# Altium PCB SL1 Xilinx Spartan-IIE PQ208 Rev1.01.PcbDoc (part 3 of 3)
Units mil, origin at the board's own origin, x right, y up, seen from the top; angles counter-clockwise.
Board outline 7087.04 x 1988.61 mil, 2 copper layers (Top Layer, Bottom Layer), stack 64.8 mil thick; 115 components, 126 nets, 642 pads, 225 vias.
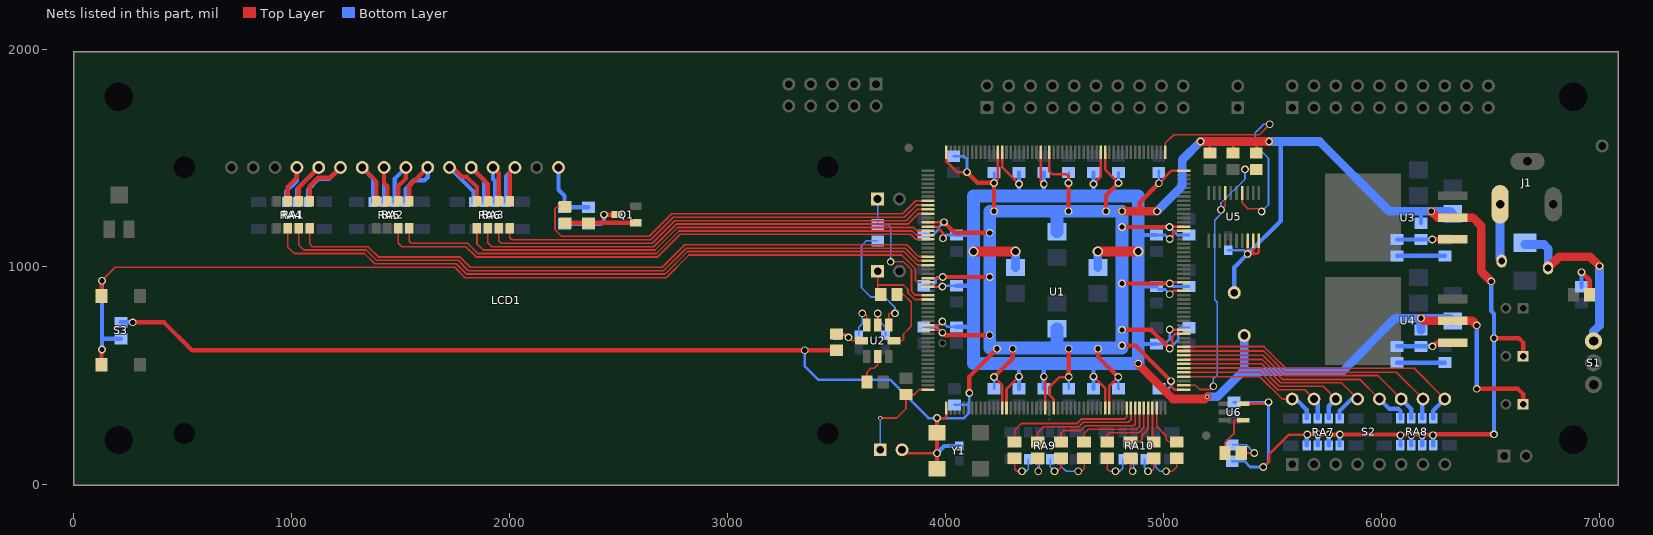
[diagram p2: the nets of this part, all layers, seen from the top]

## Via types
v1: diameter 35.43, hole 23.62, Top Layer to Bottom Layer, tented both sides, 166 vias
v2: diameter 59.06, hole 31.5, Top Layer to Bottom Layer, tented both sides, 27 vias
v3: diameter 47.24, hole 31.5, Top Layer to Bottom Layer, 18 vias
v4: diameter 47.24, hole 31.5, Top Layer to Bottom Layer, tented both sides, 11 vias
v5: diameter 19.68, hole 11.81, Top Layer to Bottom Layer, tented both sides, 2 vias
v6: diameter 35.43, hole 23.62, Top Layer to Bottom Layer, 1 vias

## Nets (pads, with @x,y where several pads share a name; then routed paths per layer and width w, separated by ;. In a path a pad name is that pad's centre, name@x,y a point inside that pad or via, vN(x,y) a via of type N, cw(c..) or ccw(c..) an arc to the next point about the centre after c; other vN are vias at no path point) (continued)
LCD_DB2: RA2.7 U1.17 | length 2577.1
  Top Layer w7.87: RA2.7@1489.57,1178.16 1489.57,1108.86 1504.92,1093.5 1799.21,1093.5 1846.46,1046.26 2680.25,1046.26 2783.6,1149.61 3840.8,1149.61 3863.44,1126.97 U1.17@3919.29,1126.97
LCD_DB3: RA2.8 U1.16 | length 2513.7
  Top Layer w7.87: RA2.8@1539.57,1178.16 1539.57,1117.91 1548.23,1109.25 1807.09,1109.25 1854.33,1062.01 2673.73,1062.01 2777.08,1165.35 3847.32,1165.35 3866.03,1146.65 U1.16@3919.29,1146.65
LCD_DB4: RA3.5 U1.15 | length 2201.6
  Top Layer w7.87: RA3.5@1850.2,1178.16 1850.2,1106.5 1878.94,1077.76 2667.21,1077.76 2770.55,1181.1 3853.85,1181.1 3868.61,1166.34 U1.15@3919.29,1166.34
LCD_DB5: RA3.6 U1.11 | length 2155.9
  Top Layer w7.87: RA3.6@1900.2,1178.16 1900.2,1111.61 1918.31,1093.5 2660.68,1093.5 2764.03,1196.85 3826.66,1196.85 3874.88,1245.08 U1.11@3919.29,1245.08
LCD_DB6: RA3.7 U1.10 | length 2095.7
  Top Layer w7.87: RA3.7@1950.2,1178.16 1950.2,1120.67 1961.61,1109.25 2654.16,1109.25 2757.51,1212.6 3818.9,1212.6 3871.06,1264.76 U1.10@3919.29,1264.76
LCD_DB7: RA3.8 U1.9 | length 2032.6
  Top Layer w7.87: RA3.8@2000.2,1178.16 2000.2,1134.65 2009.84,1125 2647.64,1125 2750.98,1228.35 3811.02,1228.35 3867.13,1284.45 U1.9@3919.29,1284.45
LCD_DB#0: LCD1.7 RA2.4 RA5.5 | length 360.5
  Top Layer w19.68: LCD1.7@1324.41,1456.69 1389.57,1391.54 RA2.4@1389.57,1302.16
  Bottom Layer w19.68: LCD1.7@1324.41,1456.69 1373.82,1407.28 RA5.5@1373.82,1298.22
LCD_DB#1: LCD1.8 RA2.3 RA5.6 | length 319.5
  Top Layer w19.68: LCD1.8@1424.41,1456.69 1424.41,1385.83 1439.57,1370.67 RA2.3@1439.57,1302.16
  Bottom Layer w19.68: RA5.6@1423.82,1298.22 1423.82,1456.1 LCD1.8@1424.41,1456.69
LCD_DB#2: LCD1.9 RA2.2 RA5.7 | length 348.4
  Top Layer w19.68: RA2.2@1489.57,1302.16 1489.57,1371.06 1524.41,1405.91 LCD1.9@1524.41,1456.69
  Bottom Layer w19.68: RA5.7@1473.82,1298.22 1473.82,1406.1 LCD1.9@1524.41,1456.69
LCD_DB#3: LCD1.10 RA2.1 RA5.8 | length 417.5
  Top Layer w19.68: RA2.1@1539.57,1302.16 1539.57,1371.85 LCD1.10@1624.41,1456.69
  Bottom Layer w19.68: RA5.8@1523.82,1298.22 1523.82,1358.46 1562.99,1397.64 1610.24,1397.64 1624.41,1411.81 LCD1.10@1624.41,1456.69
LCD_DB#4: LCD1.11 RA3.4 RA6.5 | length 431.4
  Top Layer w19.68: LCD1.11@1724.41,1456.69 1740.16,1456.69 1783.33,1413.52 1803.02,1413.52 1850.2,1366.34 RA3.4@1850.2,1302.16
  Bottom Layer w19.68: LCD1.11@1724.41,1456.69 1834.45,1346.65 RA6.5@1834.45,1298.22
LCD_DB#5: LCD1.12 RA3.3 RA6.6 | length 369.3
  Top Layer w19.68: LCD1.12@1824.41,1456.69 1900.2,1380.91 RA3.3@1900.2,1302.16
  Bottom Layer w19.68: LCD1.12@1824.41,1456.69 1884.45,1396.65 RA6.6@1884.45,1298.22
LCD_DB#6: LCD1.13 RA3.2 RA6.7 | length 327.8
  Top Layer w19.68: LCD1.13@1924.41,1456.69 1950.2,1430.91 RA3.2@1950.2,1302.16
  Bottom Layer w19.68: LCD1.13@1924.41,1456.69 1924.41,1403.74 1934.45,1393.7 RA6.7@1934.45,1298.22
LCD_DB#7: LCD1.14 RA3.1 RA6.8 | length 339.6
  Top Layer w19.68: RA3.1@2000.2,1302.16 2000.2,1432.48 LCD1.14@2024.41,1456.69
  Bottom Layer w19.68: RA6.8@1984.45,1298.22 1984.45,1416.73 LCD1.14@2024.41,1456.69
LCD_E: RA1.8 U1.21 | length 3018.1
  Top Layer w7.87: RA1.8@1082.87,1178.16 1082.87,1106.1 1095.47,1093.5 1350.39,1093.5 1397.64,1046.26 1771.65,1046.26 1818.9,999.02 2699.82,999.02 2803.17,1102.36 3821.23,1102.36 3875.37,1048.23 U1.21@3919.29,1048.23
LCD_E#: LCD1.6 RA1.1 RA4.8 | length 493.5
  Top Layer w19.68: RA1.1@1082.87,1302.16 1082.87,1370.28 1122.05,1409.45 1177.17,1409.45 LCD1.6@1224.41,1456.69
  Bottom Layer w19.68: RA4.8@1075,1298.22 1075,1354.53 1125.78,1405.31 1173.03,1405.31 LCD1.6@1224.41,1456.69
LCD_LIGHT: R2.1 U1.8 | length 1938.7
  Top Layer w7.87: R2.1@2255.91,1277.56 2219.49,1277.56 2208.66,1266.73 2208.66,1170.28 2238.19,1140.75 2641.11,1140.75 2744.46,1244.09 3803.15,1244.09 3863.19,1304.13 U1.8@3919.29,1304.13
LCD_RS: RA1.6 U1.23 | length 3142.7
  Top Layer w7.87: RA1.6@982.87,1178.16 982.87,1091.92 1012.79,1062.01 1334.65,1062.01 1381.89,1014.76 1755.91,1014.76 1803.15,967.52 2712.87,967.52 2816.21,1070.87 3808.07,1070.87 3870.08,1008.86 U1.23@3919.29,1008.86
LCD_RS#: LCD1.4 RA1.3 RA4.6 | length 350.7
  Top Layer w19.68: RA1.3@982.87,1302.16 982.87,1369.69 1024.41,1411.22 LCD1.4@1024.41,1456.69
  Bottom Layer w19.68: RA4.6@975,1298.22 975,1346.26 1024.41,1395.67 LCD1.4@1024.41,1456.69
LCD_RW: RA1.7 U1.22 | length 3079.2
  Top Layer w7.87: RA1.7@1032.87,1178.16 1032.87,1100.98 1056.1,1077.76 1342.52,1077.76 1389.76,1030.51 1763.78,1030.51 1811.02,983.27 2706.34,983.27 2809.69,1086.61 3814.71,1086.61 3872.78,1028.54 U1.22@3919.29,1028.54
LCD_RW#: LCD1.5 RA1.2 RA4.7 | length 392.1
  Top Layer w19.68: RA1.2@1032.87,1302.16 1032.87,1365.16 LCD1.5@1124.41,1456.69
  Bottom Layer w19.68: RA4.7@1025,1298.22 1025,1357.28 LCD1.5@1124.41,1456.69
LEDS0: LED0.1 U1.102 | length 216.3
  Top Layer w7.87: U1.102@4968.5,353.35 4968.5,268.7 5012.8,224.41 5012.8,207.68 5022.64,197.83 LED0.1@5061.02,197.83
LEDS1: LED1.1 U1.101 | length 158
  Top Layer w7.87: U1.101@4948.82,353.35 4948.82,349.41 4948.82,203.74 LED1.1@4954.72,197.83
LEDS2: LED2.1 U1.100 | length 212.6
  Top Layer w7.87: LED2.1@4848.42,197.83 4888.78,197.83 4901.57,210.63 4901.57,227.36 4929.13,254.92 U1.100@4929.13,353.35
LEDS3: LED3.1 U1.99 | length 303.8
  Top Layer w7.87: LED3.1@4742.13,197.83 4742.13,231.3 4750.98,240.16 4885.83,240.16 4909.45,263.78 U1.99@4909.45,353.35
LEDS4: LED4.1 U1.98 | length 391
  Top Layer w7.87: LED4.1@4635.83,197.83 4635.83,236.22 4655.51,255.91 4877.95,255.91 4889.76,267.72 U1.98@4889.76,353.35
LEDS5: LED5.1 U1.97 | length 472.4
  Top Layer w7.87: LED5.1@4529.53,197.83 4529.53,238.19 4541.34,250 4620.08,250 4641.73,271.65 4863.19,271.65 4870.08,278.54 U1.97@4870.08,353.35
LEDS6: LED6.1 U1.96 | length 547.5
  Top Layer w7.87: LED6.1@4423.23,197.83 4423.23,239.17 4450.79,266.73 4611.22,266.73 4631.89,287.4 4838.58,287.4 4850.39,299.21 U1.96@4850.39,353.35
LEDS7: LED7.1 U1.95 | length 633.5
  Top Layer w7.87: LED7.1@4316.93,197.83 4316.93,250.98 4348.43,282.48 4604.7,282.48 4625.37,303.15 4821.85,303.15 4830.71,312.01 U1.95@4830.71,353.35
M0: JP5.1 R7.2 U1.52 | length 456.8
  Top Layer w7.87: v5(3700.79,307.09) 3775.59,307.09 3818.45,349.94 3818.45,415.56 3857.49,415.56 3879.92,437.99 U1.52@3919.29,437.99
  Bottom Layer w7.87: JP5.1@3700.79,161.42 v5(3700.79,307.09)
NetC15_1: C15.1 R11.2 U2.8 | length 181.4
  Top Layer w7.87: R11.2@3499.21,692.91 3539.37,692.91 3570.87,661.42 U2.8@3614.19,661.4
  Bottom Layer w7.87: C15.1@3503.94,687.01 3534.65,687.01 v1(3555.12,677.17)
NetC16_1: C16.1 U2.6 | length 166.8
  Top Layer w7.87: U2.6@3688.88,734.74 3689.07,734.94 v1(3689.07,786.91)
  Bottom Layer w7.87: v1(3689.07,786.91) 3689.07,759.07 3724.41,723.74 C16.1@3724.41,687.01
NetC19_1: C19.1 U2.7 | length 175.6
  Top Layer w7.87: v1(3618.11,787.4) 3629.92,787.4 3638.98,778.35 U2.7@3638.99,734.24
  Bottom Layer w7.87: C19.1@3602.36,687.01 3602.36,724.08 3618.11,739.83 v1(3618.11,787.4)
NetD1_2: D1.2 F1.2 S1.3 | length 832.9
  Top Layer w39.37: F1.2@6763.78,996.06 6814.96,1047.23 6956.69,1047.24 v1(7000,1003.94)
  Bottom Layer w39.37: D1.2@6657.48,1103.24 6745.08,1103.35 6763.78,1084.65 F1.2@6763.78,996.06 ; S1.3@6972.44,660.63 6972.44,704.72 7000,731.5 v1(7000,1003.94)
NetLCD1_16: LCD1.16 R8.1 R9.1 | length 304.7
  Bottom Layer w19.68: LCD1.16@2224.41,1456.69 2224.41,1354.33 2251.97,1326.77 2251.97,1273.62 R9.1@2362.21,1273.62
NetLED0_2: LED0.2 RA10.5 | length 218.1
  Top Layer w7.87: v1(5011.81,62.99) 5041.34,62.99 5061.02,82.68 LED0.2@5061.02,123.03
  Bottom Layer w7.87: RA10.5@4962.8,118.12 4962.8,83.66 4983.46,62.99 ; 4983.46,62.99 v1(5011.81,62.99) 4983.46,62.99
NetLED1_2: LED1.2 RA10.6 | length 141.8
  Top Layer w7.87: v1(4929.13,62.99) 4944.88,62.99 4954.72,72.83 LED1.2@4954.72,123.03
  Bottom Layer w7.87: RA10.6@4912.8,118.12 4912.8,79.33 v1(4929.13,62.99)
NetLED2_2: LED2.2 RA10.7 | length 121.1
  Top Layer w7.87: LED2.2@4848.42,123.03 4848.42,72.83 v1(4858.27,62.99)
  Bottom Layer w7.87: v1(4858.27,62.99) 4862.8,67.52 RA10.7@4862.8,118.12
NetLED3_2: LED3.2 RA10.8 | length 172.1
  Top Layer w7.87: LED3.2@4742.13,123.03 4742.13,72.83 4751.97,62.99 v1(4779.53,62.99)
  Bottom Layer w7.87: v1(4779.53,62.99) 4799.21,62.99 4812.8,76.57 RA10.8@4812.8,118.12
NetLED4_2: LED4.2 RA9.5 | length 200.5
  Top Layer w7.87: v1(4608.46,62.99) 4624.02,62.99 4635.83,74.8 LED4.2@4635.83,123.03
  Bottom Layer w7.87: RA9.5@4529.72,118.12 4529.72,86.61 4553.35,62.99 v1(4608.46,62.99)
NetLED5_2: LED5.2 RA9.6 | length 142.7
  Top Layer w7.87: v1(4500,62.99) 4511.81,62.99 4529.53,80.71 LED5.2@4529.53,123.03
  Bottom Layer w7.87: RA9.6@4479.72,118.12 4479.72,83.27 v1(4500,62.99)
NetLED6_2: LED6.2 RA9.7 | length 117.9
  Top Layer w7.87: LED6.2@4423.23,123.03 4423.23,64.96 v1(4425.2,62.99)
  Bottom Layer w7.87: v1(4425.2,62.99) 4429.72,67.52 RA9.7@4429.72,118.12
NetLED7_2: LED7.2 RA9.8 | length 166.5
  Top Layer w7.87: LED7.2@4316.93,123.03 4316.93,72.83 4326.77,62.99 v1(4350.39,62.99)
  Bottom Layer w7.87: v1(4350.39,62.99) 4370.08,62.99 4379.72,72.64 RA9.8@4379.72,118.12
NetLED8_1: LED8.1 R20.1 | length 176.9
  Top Layer w7.87: LED8.1@5356.3,146.65 v1(5416.34,146.65)
  Bottom Layer w7.87: R20.1@5314.96,184.05 5378.94,184.05 v1(5416.34,146.65)
NetLED8_2: LED8.2 U6.4 | length 206.6
  Top Layer w7.87: LED8.2@5281.5,146.65 5281.5,193.9 5322.83,235.24 5322.83,291.34 5328.74,297.24 U6.4@5365.16,297.24
NetLED9_1: LED9.1 R15.1 | length 186.8
  Top Layer w19.68: v1(6917.32,976.38) 6954.72,938.98 LED9.1@6954.72,872.05
  Bottom Layer w19.68: R15.1@6917.32,909.45 v1(6917.32,976.38)
NetQ1_1: Q1.1 R2.2 R3.2 | length 322.8
  Top Layer w19.68: R2.2@2255.91,1202.76 Q1.1@2578.74,1202.76
NetQ1_3: Q1.3 R8.2 R9.2 | length 273.4
  Top Layer w19.68: v1(2433.07,1240.16) Q1.3@2492.13,1240.16
  Bottom Layer w19.68: R8.2@2251.97,1198.82 2419.29,1198.82 2433.07,1212.6 v1(2433.07,1240.16)
NetR10_2: R10.2 U2.2 | length 145.3
  Top Layer w7.87: R10.2@3639.76,472.44 3639.76,517.72 3657.48,535.43 3672.44,535.43 3688.98,551.97 U2.2@3688.99,588.57
NetR12_1: R12.1 R13.2 U3.1 | length 255.1
  Top Layer w19.68: v1@6233.07,1126.77 U3.1@6326.77,1126.77
  Bottom Layer w19.68: R12.1@6070.87,1125.98 6181.1,1125.98 v1(6232.28,1125.98)
NetR12_2: R12.2 R14.2 | length 220.5
  Bottom Layer w19.68: R12.2@6070.87,1051.18 R14.2@6291.34,1051.18
NetR17_1: R17.1 R18.2 U4.1 | length 263.2
  Top Layer w19.68: v1(6234.25,635.83) 6251.97,653.54 U4.1@6326.77,653.54
  Bottom Layer w19.68: R17.1@6070.87,635.83 v1(6234.25,635.83)
NetR17_2: R17.2 R19.1 | length 220.5
  Bottom Layer w19.68: R17.2@6070.87,561.02 R19.1@6291.34,561.02
PROG_B: R6.2 U1.106 U5.7 | length 1349.6
  Top Layer w7.87: U1.106@5092.52,457.68 5146.65,457.68 5166.34,437.99 5213.58,437.99 v1(5228.35,452.76) ; v1(5263.78,1262.8) 5283.46,1282.48 U5.7@5283.46,1338.58 ; v1(5374.03,1447.82) R6.2@5425.2,1447.83
  Bottom Layer w7.87: v1(5228.35,452.76) 5228.35,486.59 5246.06,504.3 5246.06,838.48 5235.24,849.31 5235.24,1215.24 5263.78,1243.78 5263.78,1293.31 5374.03,1403.55 v1(5374.03,1447.82)
PWR_IN: F1.1 J1.1 | length 311.8
  Bottom Layer w39.37: J1.1@6543.31,1336.61 6543.31,1037.4 F1.1@6551.18,1027.56
SW0: RA7.1 S2.16 U1.108 | length 702.2
  Top Layer w7.87: U1.108@5092.52,497.05 5441.93,497.05 5544.49,394.49 S2.16@5590.55,394.49
  Bottom Layer w19.68: S2.16@5590.55,394.49 5607.48,394.49 5657.28,344.69 5657.28,305.3 5657.48,305.1 5657.48,339.76
SW1: RA7.2 S2.15 U1.109 | length 812.8
  Top Layer w7.87: U1.109@5092.52,516.73 5444.88,516.73 5524.61,437.01 5648.03,437.01 S2.15@5690.55,394.49
  Bottom Layer w19.68: S2.15@5690.55,394.49 5707.48,377.56 RA7.2@5707.48,305.1 ; RA7.2@5707.28,310.03 S2.15@5707.28,377.76
SW2: RA7.3 S2.14 U1.110 | length 859.9
  Top Layer w7.87: U1.110@5092.52,536.42 5447.83,536.42 5531.5,452.76 5732.28,452.76 S2.14@5790.55,394.49
  Bottom Layer w19.68: RA7.3@5757.48,305.1 5757.48,361.42 S2.14@5790.55,394.49
SW3: RA7.4 S2.13 U1.111 | length 1005.5
  Top Layer w7.87: U1.111@5092.52,556.1 5450.42,556.1 5538.02,468.5 5816.54,468.5 S2.13@5890.55,394.49
  Bottom Layer w19.68: RA7.4@5807.48,305.1 5807.48,339.96 5862.01,394.49 S2.13@5890.55,394.49
SW4: RA8.1 S2.12 U1.112 | length 1127.4
  Top Layer w7.87: U1.112@5092.52,575.79 5453.01,575.79 5490.03,538.76 5544.54,484.25 5900.79,484.25 5990.55,394.49 S2.12@5989.37,394.49
  Bottom Layer w19.68: S2.12@5990.55,394.49 6035.79,349.25 6076.61,349.25 6086.61,339.25 RA8.1@6086.61,305.1
SW5: RA8.2 S2.11 U1.113 | length 1189.7
  Top Layer w7.87: U1.113@5092.52,595.47 5455.59,595.47 5492.37,558.7 5549.1,501.97 5983.07,501.97 S2.11@6090.55,394.49
  Bottom Layer w19.68: S2.11@6090.55,394.49 6136.61,348.43 RA8.2@6136.61,305.1
SW6: RA8.3 S2.10 U1.114 | length 1280.5
  Top Layer w7.87: U1.114@5092.52,615.16 5458.18,615.16 5555.62,517.72 6067.32,517.72 S2.10@6190.55,394.49
  Bottom Layer w19.68: RA8.3@6186.61,305.1 6186.61,390.55 S2.10@6190.55,394.49
SW7: RA8.4 S2.9 U1.115 | length 1409.3
  Top Layer w7.87: U1.115@5092.52,634.84 5460.76,634.84 5499.81,595.8 5560.17,535.43 6149.61,535.43 S2.9@6290.55,394.49
  Bottom Layer w19.68: RA8.4@6236.61,305.1 6236.61,340.55 S2.9@6290.55,394.49
TDI_C: U1.157 U5.4 | length 1188.3
  Top Layer w7.87: U1.157@5007.87,1526.57 5007.87,1568.9 5046.26,1607.28 5439.96,1607.28 v1(5487.2,1654.53) ; U5.4@5360.24,1338.58 5360.24,1294.29 5386.81,1267.72 5437.28,1267.72 v1(5450,1255)
  Bottom Layer w7.87: v1(5450,1255) 5481.3,1286.3 5481.3,1498.62 5421.26,1558.66 5421.26,1616.14 5459.65,1654.53 v1(5487.2,1654.53)
TEST: R16.2 S3.1 S3.2 U1.27 | length 4504
  Top Layer w7.87: v1(129.92,937.01) 191.54,998.62 1748.03,998.62 1795.87,950.79 2718.5,950.79 2822.83,1055.12 3799.21,1055.12 3862.2,992.13 3862.2,937.99 3870.08,930.12 U1.27@3919.29,930.12
  Top Layer w19.68: S3.1@127.95,550.79 127.95,620.08 v1(129.92,622.05) ; S3.2@127.95,866.14 v1@127.95,935.04
  Bottom Layer w19.68: v1(129.92,622.05) v1(129.92,937.01) ; 129.92,671.26 R16.2@216.54,671.26
VCCINT: C3.1 C7.1 C8.1 C10.1 C20.1 C21.1 C25.1 C26.1 C28.1 C29.1 C30.1 C32.1 C34.2 C38.1 C39.1 C41.1 R18.1 TP3.1 U1.14 U1.28 U1.37 U1.67 U1.76 U1.90 U1.119 U1.128 U1.142 U1.172 U1.186 U1.195 U4.2 | length 9314.6
  Top Layer w11.81: U1.37@3919.2,732.8 3968.03,732.8 v1(3985.24,750) ; U1.28@3919.2,909.96 v1@3985.24,909.96 ; U1.14@3919.2,1185.55 3958.15,1185.55 3988.19,1155.51 v1(3988.19,1131.89) ; U1.195@4259.76,1526.1 4259.76,1457.76 v1(4336.61,1380.91) ; U1.67@4279.44,352.87 4279.44,439.87 v1(4336.61,497.05) ; U1.186@4436.92,1526.1 4436.92,1394.77 v1(4450.79,1380.91) ; v1(4450.79,497.05) 4456.61,491.23 U1.76@4456.61,352.87 ; v1(4679.13,497.05) 4732.2,443.98 U1.90@4732.2,352.87 ; v1(4679.13,1380.91) 4712.51,1414.28 U1.172@4712.51,1526.1 ; v1@5028.54,713.11 U1.119@5092.43,713.11 ; v1(5028.54,875) 5043.82,890.28 U1.128@5092.43,890.28 ; v1(5028.54,1127.95) 5043.31,1142.72 5043.31,1154.25 5054.92,1165.87 U1.142@5092.43,1165.87
  Top Layer w19.68: v1(6437.01,440.94) 6625.98,440.94 6649.61,417.32 C3.1@6649.61,370.08
  Top Layer w39.37: v1(4883.86,558.07) 4887.8,550.2 5043.53,394.46 5189.74,394.46 v5(5199.8,404.53) ; v1(6181.1,764.76) 6192.32,753.54 6415.75,753.54 v1(6437.01,732.28)
  Top Layer w47.24: v4(4127.95,1070.87) v4(4320.87,1070.87) ; v4(4698.82,1070.87) v4(4883.86,1070.87)
  Bottom Layer w11.81: v1(3985.24,750) 4009.84,725.39 C32.1@4049.21,725.39 ; v1(3985.24,910.43) 3985.24,914.37 C25.1@4049.21,914.37 ; v1(3988.19,1131.89) 4002.95,1146.65 C20.1@4049.21,1146.65 ; C34.2@4966.54,646.65 5004.78,646.65 ; C26.1@4966.54,910.43 4980.31,896.65 5006.89,896.65 v1(5028.54,875) ; C21.1@4966.54,1146.65 5006.89,1146.65 5025.59,1127.95 v1(5028.54,1127.95) ; 5004.36,647.07 5008.27,650.98 ; 5008.76,650.49 5028.54,670.28 v1(5028.54,713.58)
  Bottom Layer w19.68: C32.1@4049.21,725.39 4127.95,725.39 ; C25.1@4049.21,914.37 4127.95,914.37 ; C20.1@4049.21,1146.65 4127.95,1146.65 ; C38.1@4336.61,441.93 v1(4336.61,497.05) 4336.61,550.2 ; 4336.61,1330.71 v1(4336.61,1380.91) C7.1@4336.61,1433.07 ; C39.1@4450.79,441.93 4450.79,550.2 ; 4450.79,1330.71 C8.1@4450.79,1433.07 ; C41.1@4679.13,441.93 4679.13,550.2 ; 4679.13,1330.71 C10.1@4679.13,1433.07 ; 4883.86,646.65 C34.2@4966.54,646.65 ; 4883.86,910.43 C26.1@4966.54,910.43 ; 4883.86,1146.65 C21.1@4966.54,1146.65 ; v1(6437.01,440.94) v1(6437.01,732.28)
  Bottom Layer w39.37: C28.1@4320.87,997.05 v4(4320.87,1070.87) ; C29.1@4698.82,997.05 v4(4698.82,1070.87) ; v5(5199.8,404.53) 5247.05,404.53 5361.22,518.7 5818.9,518.7 6062.01,764.76 6313.98,764.76 C30.1@6326.77,751.97 ; 5370.08,518.7 TP3.1@5370.08,685.04 ; R18.1@6181.1,710.63 v1(6181.1,764.76)
  Bottom Layer w59.06: 4127.95,558.07 v1(4883.86,558.07) 4883.86,1325.79 4679.13,1325.79 4127.95,1325.79 v4(4127.95,1070.87) 4127.95,558.07
VCCO: C2.1 C4.1 C5.2 C6.1 C9.1 C11.1 C12.1 C14.1 C17.2 C18.2 C22.2 C23.1 C24.2 C31.1 C33.1 C35.1 C36.2 C37.1 C40.1 C42.1 C43.1 C44.2 C45.1 JP5.2 R4.1 R5.1 R6.1 R11.1 R13.1 R16.1 R20.2 RA7.5 RA7.6 RA7.7 RA7.8 RA8.5 RA8.6 RA8.7 RA8.8 TP2.1 U1.13 U1.26 U1.38 U1.53 U1.66 U1.78 U1.91 U1.105 U1.118 U1.130 U1.143 U1.156 U1.171 U1.184 U1.196 U1.208 U3.2 U5.18 U5.19 U5.20 U6.5 Y1.1 Y1.4 | length 21130.7
  Top Layer w11.81: JP5.2@3800.79,161.42 3816.54,145.67 v1(3960.63,145.67) ; U1.38@3919.2,713.11 3970.94,713.11 v1@3997.05,687.01 ; U1.26@3919.2,949.33 3982.8,949.33 v1(3987.2,953.74) v1@3992.13,953.74 ; U1.13@3919.2,1205.24 v1@3993.11,1205.24 ; v1(3960.63,307.09) 3996.06,307.09 4003.85,314.87 U1.53@4003.85,352.87 ; U1.208@4003.85,1526.1 4003.85,1483.35 4052.17,1435.04 v1(4098.43,1435.04) ; v1(4222.44,495.08) 4259.76,457.76 U1.66@4259.76,352.87 ; v1(4222.44,1385.83) 4240.07,1403.46 U1.196@4240.07,1526.1 ; U1.184@4476.29,1526.1 4476.29,1439.06 4489.17,1426.18 4553.15,1426.18 4563.98,1415.35 v1(4563.98,1385.83) ; U1.78@4495.98,352.87 4495.98,393.79 4476.38,413.39 4476.38,448.82 4522.64,495.08 v1(4564.96,495.08) ; U1.171@4732.2,1526.1 4732.2,1446.94 v1(4793.31,1385.83) ; U1.91@4751.88,352.87 4751.88,454.64 v1(4792.32,495.08) ; v1(4978.35,1383.86) 5036.42,1441.93 U1.156@5092.52,1441.93 ; v1(5027.56,1183.07) 5027.56,1185.55 U1.143@5092.43,1185.55 ; v1(5028.54,625.98) 5040.04,637.48 5040.04,680.03 5053.44,693.43 U1.118@5092.43,693.43 ; v1(5028.54,924.21) v1@5034.45,930.12 ; v1(5034.45,476.38) 5034.45,452.76 5049.68,437.52 U1.105@5092.43,437.52 ; v1@5034.92,929.65 U1.130@5092.43,929.65 ; R4.1@5212.6,1522.64 5212.6,1568.9 ; R5.1@5318.9,1522.64 5318.9,1568.9 ; U6.5@5365.16,372.05 5473.42,372.05 v1(5481.3,379.92) ; U5.18@5385.83,1120.08 v1(5385.83,1060.04) 5429.13,1060.04 5437.01,1067.91 U5.20@5437.01,1120.08 ; 5411.42,1060.04 U5.19@5411.42,1120.08 ; R6.1@5425.2,1522.64 5425.2,1577.76 5426.18,1578.74 ; v1(5457.68,82.68) 5484.17,109.17 5484.17,140.07 5575.4,231.3 v1(5658.86,231.29)
  Top Layer w19.68: v1(271.65,746.06) 415.35,746.06 543.31,618.11 v1(3354.32,618.11) R11.1@3499.21,618.11 ; Y1.1@3960.63,62.99 v1(3960.63,307.09) ; v1(3987.2,953.74) v1(4202.76,953.74) ; v1(3993.11,1205.71) 4042.32,1156.5 v1(4202.76,1156.5) ; v1@3997.05,687.01 v1(4202.76,687.01) ; v1(4098.43,1435.04) 4147.64,1385.83 v1(4222.44,1385.83) v1(4222.44,1255.91) ; v1(4109.25,422.24) 4109.25,498.03 v1(4236.22,625) ; v1(4222.44,495.08) 4308.07,580.71 v1(4308.07,625) ; v1(4563.98,1255.91) v1(4563.98,1385.83) ; v1(4564.96,495.08) v1(4564.96,625) ; v1(4699.8,625) 4699.8,587.6 v1(4792.32,495.08) ; v1(4736.22,1255.91) 4736.22,1328.74 v1(4793.31,1385.83) ; v1(4809.06,639.76) 4871.06,639.76 v1(5034.45,476.38) ; v1(4809.06,711.61) 4942.91,711.61 v1(5028.54,625.98) ; v1(4809.06,924.21) v1(5028.54,924.21) ; v1(4809.06,1183.07) v1(5027.56,1183.07) ; 4890.75,1255.91 4890.75,1296.26 v1(4978.35,1383.86) ; v1(5169.29,1575.79) 5179.13,1568.9 5415.35,1568.9 ; v1(5658.86,231.29) v1@6237.99,231.29 ; v1(6236.22,228.35) 6240.16,232.28 v1(6515.75,232.28) ; v1(6515.75,673.23) 6629.92,673.23 6649.61,653.54 C2.1@6649.61,590.55
  Top Layer w39.37: v1(4809.06,1255.91) v1(4969.49,1255.91) ; v1(5169.29,1575.79) v1(5484.25,1575.79) ; v1(6228.35,1255.91) 6257.48,1226.77 6418.9,1226.77 6456.69,1188.98 6456.69,980.31 v1(6502.95,934.06)
  Bottom Layer w11.81: v1(3354.32,618.11) 3354.32,544.29 3415.35,483.27 3746.06,483.27 3921.26,307.09 4084.65,307.09 4109.25,331.69 v1(4109.25,422.24) ; C31.1@3899.61,725.39 3958.66,725.39 v1(3985.24,698.82) ; C22.2@3899.61,914.37 3939.96,914.37 3953.74,928.15 3953.74,943.9 3963.58,953.74 v1(3987.2,953.74) ; C17.2@3899.61,1146.65 3941.93,1146.65 3965.55,1170.28 3965.55,1178.15 v1(3993.11,1205.71) ; C5.2@4037.4,1507.87 4085.63,1507.87 4098.43,1495.08 v1(4098.43,1435.04) ; C36.2@4041.34,367.13 4109.25,367.13 ; C37.1@4222.44,441.93 v1(4222.44,495.08) ; v1(4222.44,1385.83) C6.1@4222.44,1433.07 ; v1(4563.98,1385.83) C9.1@4564.96,1433.07 ; C40.1@4564.96,441.93 v1(4564.96,495.08) ; v1(4792.32,495.08) 4792.32,442.91 C42.1@4793.31,441.93 ; v1(4793.31,1385.83) C11.1@4793.31,1433.07 ; C43.1@4978.35,441.93 5022.64,441.93 5034.45,453.74 v1(5034.45,476.38) ; v1(4978.35,1383.86) C12.1@4978.35,1441.93 ; v1(5027.56,1183.07) 5063.98,1146.65 C18.2@5116.14,1146.65 ; v1(5028.54,625.98) 5066.93,664.37 5066.93,713.58 5074.8,721.46 C35.1@5116.14,721.46 ; v1(5028.54,924.21) 5042.32,910.43 C24.2@5116.14,910.43 ; C4.1@5296.26,1076.77 5369.09,1076.77 v1(5385.83,1060.04) ; R20.2@5314.96,109.25 5371.06,109.25 5397.62,82.68 v1(5457.68,82.68) 5481.3,106.3 v1(5481.3,379.92) C44.2@5322.83,379.92
  Bottom Layer w19.68: R16.1@216.54,746.06 v1(271.65,746.06) ; v1(3960.63,145.67) 3994.09,179.13 C45.1@4062.99,179.13 ; TP2.1@5324.13,881.88 5324.13,998.35 v1(5385.83,1060.04) 5537.4,1210.63 5537.4,1575.79 v1(5484.25,1575.79) ; RA7.8@5657.48,181.1 v1@5657.48,229.91 ; RA7.7@5707.48,181.1 v1@5707.48,229.91 ; RA7.6@5757.48,181.1 v1@5757.48,229.91 ; RA7.5@5807.48,181.1 v1@5807.48,229.91 ; RA8.8@6086.61,181.1 v1@6086.61,229.91 ; RA8.7@6136.61,181.1 v1@6136.61,229.91 ; R13.1@6181.1,1202.76 6181.1,1256.89 ; RA8.6@6186.61,181.1 v1@6186.61,229.91 ; RA8.5@6236.61,181.1 v1@6236.61,229.91 ; v1(6502.95,934.06) 6502.95,798.23 6515.75,785.43 v1(6515.75,673.23) v1(6515.75,232.28)
  Bottom Layer w39.37: v1(4969.49,1255.91) 5085.63,1372.05 5085.63,1492.13 v1(5169.29,1575.79) ; v1(5484.25,1575.79) 5715.55,1575.79 6035.43,1255.91 6314.96,1255.91 C14.1@6326.77,1244.1
  Bottom Layer w59.06: 4511.81,629.92 C33.1@4511.81,716.54 ; C23.1@4511.81,1161.42 4511.81,1255.91 ; 4511.81,1255.91 v1(4809.06,1255.91) 4809.06,628.94 4202.76,628.94 v1(4202.76,687.01) v1(4202.76,953.74) 4202.76,1255.91 v1(4222.44,1255.91) 4511.81,1255.91
  other v1: 6086.22,228.35 6136.22,228.35 6186.22,228.35 5708.86,231.29 5758.86,231.29 5808.86,231.29
XOUT: R22.2 U2.5 | length 590.7
  Top Layer w7.87: U2.5@3738.99,734.24 3738.98,770.47 3738.98,782.28 3744.09,787.4 v1(3767.72,787.4)
  Bottom Layer w7.87: R22.2@3689.43,1120.28 3636.02,1120.28 3614.17,1094.5 3614.17,905.51 3657.48,862.2 3721.03,862.2 3767.72,815.52 v1(3767.72,787.4) v1@3755.91,799.21
XOUT_ALT: JP3.1 R22.1 U1.30 | length 630.6
  Top Layer w7.87: v1(3748.03,1023.62) 3807.09,1023.62 3843.82,986.89 3843.82,888.47 3861.22,871.06 U1.30@3919.29,871.06
  Bottom Layer w7.87: JP3.1@3688.72,1311.42 3688.72,1195.8 3689.43,1195.09 3734.05,1195.09 3748.03,1181.1 v1(3748.03,1023.62)
YOUT: R21.2 U2.4 | length 309.9
  Top Layer w7.87: U2.4@3763.8,661.4 3799.21,661.42 3807.09,669.29 3807.09,692.91 3842.5,728.33 3842.5,838.04 3806.98,873.57 R21.2@3777.35,873.57
YOUT_ALT: JP4.1 R21.1 U1.31 | length 376.1
  Top Layer w7.87: JP4.1@3688.72,980.71 3688.72,887.4 R21.1@3702.55,873.57 ; 3692.65,917.32 3807.09,917.32 3828.07,896.34 3828.07,880.59 3857.28,851.38 U1.31@3919.29,851.38
pads on no net: HDR2.1 HDR3.1 LCD1.M1 LCD1.M2 LCD1.M3 LCD1.M4 RA1.4 RA1.5 RA4.5 RA4.STP RA5.STP RA6.STP RA7.STP RA8.STP RA9.STP RA10.STP U1.3 U1.24 U1.29 U1.33 U1.34 U1.35 U1.36 U1.40 U1.41 U1.42 U1.43 U1.44 U1.45 U1.46 U1.47 U1.48 U1.49 U1.55 U1.56 U1.57 U1.58 U1.59 U1.60 U1.61 U1.62 U1.63 U1.64 U1.68 U1.69 U1.70 U1.71 U1.73 U1.74 U1.75 U1.81 U1.82 U1.83 U1.84 U1.86 U1.87 U1.88 U1.89 U1.93 U1.94 U1.116 U1.139 U1.140 U1.141 U1.145 U1.146 U1.147 U1.148 U1.149 U1.150 U1.151 U1.152 U1.154 U1.192 U1.193 U1.194 U1.198 U1.199 U1.200 U1.201 U1.202 U1.203 U1.204 U1.205 U1.206 U1.FID1 U1.FID2 U2.0 U2.1 U3.4 U4.4 U5.2 U5.9 U5.12 U5.13 U5.14 U5.15 U5.16 U6.1

## Polygon pours and split planes (outlines as drawn)
GND on Top Layer "Top Layer-GND" (solid, remove dead copper, pour order 1000): 0,0 0,1988.19 7086.61,1988.19 7086.61,0
GND on Bottom Layer "Bottom Layer-GND" (solid, remove dead copper, pour order 1001): 7086.42,0.01 7086.42,1988.2 -0.2,1988.2 -0.2,0.01

## Keep-outs
Keep-Out Layer:
  circle w7.87: c6879.92,1781.5 r157.48
  circle w7.87: c206.69,1781.5 r157.48
  circle w7.87: c6879.92,207.68 r157.48
  circle w7.87: c206.69,206.69 r157.48
  lines w25: 0,0 7086.61,0 7086.61,1988.19 0,1988.19 0,0

## Silkscreen, mask and mechanical layers (free items; w line width, h text height)
Top Overlay:
  drawing of 3334 lines, arcs and shapes, not listed
  text "SL" at 2133.15,1823.65 h51.18
  text "REV 1.01" at 2333.15,1823.65 h51.18
  text "CONTRAST" at 74.8,1047.24 h39.37
  text "PWR" at 7060,810 h47.24 r90
  text "TEST/" at 141.72,452.76 h39.37
  text "RESET" at 133.86,385.82 h39.37
  text "7" at 4314.96,255.91 h47.24
  text "6" at 4409.45,255.91 h47.24
  text "5" at 4515.75,255.91 h47.24
  text "4" at 4618.11,255.91 h47.24
  text "3" at 4728.35,255.91 h47.24
  text "2" at 4830.71,255.91 h47.24
  text "1" at 4940.94,255.91 h47.24
  text "0" at 5043.31,255.91 h47.24
  text "DONE" at 5234.96,37.24 h47.24
Unit PCB Boundary:
  lines w7.87: 0,0 0,1988.19 7086.61,1988.19 7086.61,0 0,0
  text "PCB boundary coincides with centre-line of tracks" at 0,-393.7 h29.53
Overlay boundary:
  lines w7.87: 20,20 7066.61,20 7066.93,1969.49 20,1970 20,20
  text "PCB boundary coincides with centre-line of tracks" at 0,-393.7 h29.53
LayerID:
  text ".Printout_Name" at 0,-236.22 h29.53
Dimensions:
  text "Dimensions in millimetres (mm)" at 0,-314.96 h29.53
Design Information:
  drawing of 719 lines, arcs and shapes, not listed
  text "Spirit Level Rev 1.01" at 11112.09,6219.45 h50
  text "DESIGN INFORMATION" at 8907.09,6214.45 h60
  text "BOARD NAME:" at 10387.09,6214.45 h60
  text "BOARD TECHNOLOGY" at 8907.09,6114.45 h60
  text "BOARD SIZE (REFER ALSO PROFILING INFORMATION)" at 10807.09,6114.45 h50
  text "50.50mm" at 11111.02,6024.92 h60
  text "15.000" at 9529.09,6021.46 h60
  text "180.00mm" at 12016.54,6020.98 h60
  text "7.874" at 10079.09,6016.46 h60
  text "7.874" at 9018.35,6014.45 h60
  text "(Unit)" at 12649.21,6012.17 h60
  text "X" at 11738.94,5994.45 h70
  text "(MIN. TRACK/   PADS  /CLEARANCE IN 0.001'')" at 8847.09,5914.45 h50
  text "MINIMUM ANNULAR RING 0.05MM (0.002'') EXTERNAL PER IPC-2221 CLASS 3 LEVEL C AND IS THE" at 8907.09,5814.45 h50
  text "MANUFACTURING REGISTRATION ALLOWANCE" at 8907.09,5724.45 h50
  text "LAND SIZE CALCULATION MINIMUM - NOMINAL HOLE SIZE + 0.508MM (0.020'')" at 8907.09,5614.45 h50
  text "AS INSTRUCTED" at 12294.09,5441.46 h60
  text "X" at 10389.09,5436.46 h60
  text "CIRCUIT TYPE:" at 8907.09,5434.45 h60
  text "SS" at 9807.09,5434.45 h50
  text "DS" at 10507.09,5434.45 h50
  text "X" at 11082.09,5434.45 h60
  text "PTH" at 11207.09,5434.45 h50
  text "ML" at 11637.09,5434.45 h50
  text "X" at 11787.09,5434.45 h60
  text "No. OFF" at 11907.09,5434.45 h50
  text "FINGER CONNECTOR DIM PER:" at 8907.09,5314.45 h60
  text "AS SHOWN" at 11907.09,5314.45 h50
  text "No. OFF TOTAL" at 9567.09,5204.45 h60
  text "ONE SIDE" at 11207.09,5204.45 h50
  text "BOTH SIDES" at 11907.09,5194.45 h50
  text "VIAS:" at 8907.09,5089.45 h60
  text "NONE" at 9357.09,5089.45 h45
  text "X" at 9687.09,5089.45 h60
  text "FEED THRU'" at 9807.09,5089.45 h45
  text "X" at 10387.09,5089.45 h60
  text "TENTED" at 10507.09,5089.45 h45
  text "BURIED LAYER SEQUENCE" at 11207.09,5089.45 h45
  text "UNIQUE DRILL" at 9807.09,4969.45 h45
  text "2 SIZE" at 10507.09,4969.45 h45
  text "BLIND LAYER SEQUENCE" at 11207.09,4969.45 h45
  text "Layer Stack Manager (Protel)" at 10302.09,4879.45 h50
  text "X" at 11787.09,4879.45 h60
  text "AS SHOWN" at 11907.09,4879.45 h50
  text "LAYER CONSTRUCTION PER:" at 8907.09,4874.45 h60
  text "Protel" at 12097.09,4774.45 h50
  text "(PFW)" at 12502.09,4769.45 h50
  text "ARTWORK:" at 8907.09,4764.45 h60
  text "MANUAL" at 9807.09,4764.45 h50
  text "DIGITISED" at 10507.09,4764.45 h50
  text "X" at 11087.09,4764.45 h60
  text "CAD" at 11207.09,4764.45 h50
  text "TYPE" at 11637.09,4764.45 h50
  text "ARTWORK/PATTERN MASTER LIST" at 8907.09,4579.45 h60
  text "DESCRIPTION" at 8957.09,4484.45 h50
  text "DRAWING No./CAD FILE REF." at 9692.09,4484.45 h50
  text "LAYER NAME" at 11317.09,4484.45 h50
  text "GERBER FILE REF" at 12134.09,4481.46 h50
  text "PCB FILE" at 8895.91,4387.44 h50
  text "SpiritLevel_2E_Rev1_01" at 9697.91,4384.45 h50
  text "PcbDoc" at 10927.91,4384.45 h40
  text "Top Paste Mask" at 11249.92,4287.44 h40
  text "GTP" at 12927.91,4284.45 h50
  text "GERBER FILE" at 8895.91,4282.44 h50
  text "GTO" at 12925.91,4186.46 h50
  text "Top Overlay" at 11249.92,4185.43 h40
  text "GERBER FILE" at 8895.91,4182.44 h50
  text "Top Solder Mask" at 11249.92,4089.45 h40
  text "GTS" at 12927.91,4084.45 h50
  text "GERBER FILE" at 8895.91,4082.44 h50
  text "TOP LAYER" at 11249.92,3987.44 h40
  text "GTL" at 12927.91,3984.45 h50
  text "GERBER FILE" at 8895.91,3982.44 h50
  text "BOTTOMLAYER" at 11249.92,3889.8 h40
  text "GBL" at 12927.91,3886.81 h50
  text "GERBER FILE" at 8895.91,3882.44 h50
  text "Bottom Solder Mask" at 11249.92,3791.81 h40
  text "GBS" at 12927.91,3786.81 h50
  text "GERBER FILE" at 8895.91,3782.44 h50
  text "Bottom Overlay" at 11249.92,3689.8 h40
  text "GBO" at 12927.91,3686.81 h50
  text "GERBER FILE" at 8895.91,3682.44 h50
  text "Bottom Paste Mask" at 11249.92,3591.81 h40
  text "GBP" at 12927.91,3586.81 h50
  text "GERBER FILE" at 8895.91,3582.44 h50
  text "PCB Boundary" at 11249.92,3489.8 h40
  text "GM1" at 12927.91,3486.81 h50
  text "GERBER FILE" at 8895.91,3482.44 h50
  text "Plated Route Details" at 11249.92,3390.59 h40
  text "GM2" at 12927.91,3387.6 h50
  text "GERBER FILE" at 8895.91,3382.44 h50
  text "APERTURE LIST" at 8895.91,3283.9 h50
  text "APR" at 10967.28,3280.91 h50
  text "DRILL REPORT" at 8895.91,3183.9 h50
  text "DRR" at 10967.28,3180.91 h50
  text "EXCELLON DRILL" at 8895.91,3083.9 h50
  text "TXT" at 10967.28,3080.91 h50
  text "MATERIAL:" at 8907.09,2174.45 h60
  text "GLASS FIBRE EPOXY RESIN NEMA GRADE FR4 (MIL-S-13949H)" at 9917.09,2164.45 h50
  text "X" at 9812.09,2159.45 h60
  text "THICKNESS:" at 9217.09,2049.45 h50
  text "0.8mm" at 9917.09,2049.45 h50
  text "1.2mm" at 10612.09,2049.45 h50
  text "1.6mm" at 11307.09,2049.45 h50
  text "2.4mm" at 12007.09,2049.45 h50
  text "3.2mm" at 12707.09,2049.45 h50
  text "X" at 11212.09,2044.45 h60
  text "TOLERANCE:" at 9212.09,1929.45 h50
  text "IN A/W IPC-D-300G CLASS" at 9907.09,1929.45 h50
  text "3 LEVEL B" at 11282.09,1929.45 h50
  text "OTHER +/-" at 12007.09,1929.45 h50
  text "X" at 9812.09,1924.45 h60
  text "BOW & TWIST:" at 9117.09,1809.45 h50
  text "IN A/W IPC-D-300G CLASS" at 9907.09,1809.45 h50
  text "3 LEVEL B" at 11282.09,1809.45 h50
  text "AS SHOWN" at 12012.09,1804.45 h50
  text "X" at 9812.09,1799.45 h60
  text "COPPER THICKNESS (FINISHED)" at 9212.09,1679.45 h50
  text "OUTER:" at 9402.09,1589.45 h50
  text "18um" at 9917.09,1589.45 h50
  text "35um" at 10982.09,1589.45 h50
  text "70um" at 12017.09,1589.45 h50
  text "X" at 10874.09,1581.46 h60
  text "INNER SIGNAL:" at 9072.09,1469.45 h50
  text "18um" at 9917.09,1469.45 h50
  text "35um" at 10982.09,1469.45 h50
  text "70um" at 12017.09,1469.45 h50
  text "INNER PWR:" at 9217.09,1349.45 h50
  text "18um" at 9917.09,1349.45 h50
  text "35um" at 10982.09,1349.45 h50
  text "70um" at 12017.09,1349.45 h50
  text "STRUCTURE:" at 8907.09,1229.45 h60
  text "REFER" at 9917.09,1229.45 h50
  text "AS PER DRAWING No." at 9912.09,1104.45 h50
  text "AS SHOWN" at 12012.09,1104.45 h50
  text "X" at 11912.09,1099.45 h60
  text "DRILLING:" at 8907.09,994.45 h60
  text "VIEWED FROM:" at 9102.09,904.45 h50
  text "COMPONENT SIDE" at 9917.09,904.45 h45
  text "SOLDER SIDE" at 10972.09,904.45 h45
  text "X" at 9812.09,894.45 h60
  text "REFERENCE:" at 9192.09,784.45 h50
  text "AS SHOWN" at 9912.09,779.45 h45
  text "PATTERN MASTER LIST" at 10977.09,779.45 h45
  text "X" at 11912.09,779.45 h60
  text "NC_DRILL FILES" at 12012.09,779.45 h45
  text "X" at 9812.09,774.45 h60
  text "PTH MINIMUM COPPER THICKNESS:" at 9422.09,664.45 h50
  text "20um" at 10982.09,664.45 h50
  text "X" at 10877.09,659.45 h60
  text "OTHER" at 12012.09,659.45 h50
  text "NPTH:" at 9442.09,544.45 h50
  text "TENTED" at 9912.09,539.45 h45
  text "X" at 10877.09,539.45 h60
  text "PADS REMOVED" at 10977.09,539.45 h45
  text "REMOVE PADS" at 12012.09,539.45 h45
  text "X" at 9812.09,534.45 h60
  text "2nd DRILL" at 9912.09,419.45 h45
  text "BOTH" at 10977.09,419.45 h45
  text "AS SHOWN" at 11462.09,419.45 h45
  text "NONE" at 12012.09,419.45 h45
  text "BOARD FINISH:" at 8907.09,304.45 h60
  text "X" at 9812.09,299.45 h60
  text "ETCHING" at 9912.09,299.45 h45
  text "REFER PATTERN MASTER LIST" at 10977.09,299.45 h45
  text "LEGEND / SCREEN PRINT:" at 9707.09,184.45 h50
  text "NONE" at 10977.09,179.45 h45
  text "COMPONENT" at 11462.09,179.45 h45
  text "SOLDER" at 12012.09,179.45 h45
  text "X" at 11362.09,174.45 h60
  text "X" at 11912.09,174.45 h60
  text "COLOUR:" at 9322.09,64.45 h50
  text "WHITE" at 9912.09,59.45 h45
  text "YELLOW" at 10977.09,59.45 h45
  text "OTHER" at 12012.09,59.45 h45
  text "X" at 9812.09,54.45 h60
  text "X" at 9812.09,-60.55 h60
  text "LIQUID PHOTOIMAGEABLE" at 9912.09,-60.55 h45
  text "SCREEN PRINT" at 11462.09,-60.55 h45
  text "MATTE" at 9912.09,-180.55 h45
  text "GLOSS" at 10412.09,-180.55 h45
  text "GREEN" at 10977.09,-180.55 h45
  text "BLUE" at 11462.09,-180.55 h45
  text "G/Y" at 12012.09,-180.55 h45
  text "OTHER" at 12462.09,-180.55 h45
  text "X" at 10307.09,-185.55 h60
  text "SOLDER MASK COLOUR:" at 8907.09,-295.55 h45
  text "BLACK" at 9912.09,-300.55 h45
  text "GREEN" at 10412.09,-300.55 h45
  text "YELLOW" at 10977.09,-300.55 h45
  text "BLUE" at 11462.09,-300.55 h45
  text "OTHER" at 12012.09,-300.55 h45
  text "X" at 9807.09,-305.55 h60
  text "TRACK FINISH:" at 8907.09,-415.55 h60
  text "SELECTIVE SOLDER (HASL)" at 9912.09,-420.55 h45
  text "REFLOW SOLDER" at 11462.09,-420.55 h45
  text "X" at 9809.13,-423.5 h60
  text "SELECTIVE GOLD" at 9912.09,-540.55 h45
  text "um  (AREA" at 10977.09,-540.55 h45
  text "sq. mm)" at 12072.09,-540.55 h45
  text "REFER PATTERN MASTER LIST" at 9912.09,-660.55 h45
  text "OTHER" at 11462.09,-660.55 h45
  text "EDGE BOARD" at 8907.09,-775.55 h60
  text "1.3um HARD GOLD OVER 5um     NICKEL / TIN-NICKEL" at 9912.09,-780.55 h45
  text "CONTACTS:" at 8907.09,-860.55 h60
  text "HARD FINISH GOLDE PLATE" at 9912.09,-900.55 h45
  text "OTHER" at 11462.09,-900.55 h45
  text "AS SHOWN" at 9912.09,-1020.55 h45
  text "REFER" at 11462.09,-1020.55 h45
  text "PROFILING:" at 8907.09,-1140.55 h60
  text "AS DIMENSIONED, MEASURED AND CUT FROM SPECIFIED DATUM." at 9912.09,-1140.55 h45
  text "X" at 9812.09,-1145.55 h60
  text "REFER PCB BLANK DWG No." at 9917.09,-1255.55 h50
  text "USE PROFILE / ROUTE TAPE SUPPLIED (REFER PATTERN MASTER LIST)" at 9917.09,-1375.55 h50
  text "SQUARE CUT" at 9917.09,-1495.55 h50
  text "N.C. ROUTE" at 10617.09,-1495.55 h50
  text "V. SCORE" at 11317.09,-1495.55 h50
  text "BLANK" at 12017.09,-1495.55 h50
  text "ACCEPTABILITY:" at 8907.09,-1600.55 h60
  text "MATERIALS AND WORKMANSHIP FOR ALL PRINTED WIRING BOARDS TO MEET" at 9782.09,-1605.55 h50
  text "OR EXCEED THE REQUIREMENTS OF:" at 9782.09,-1715.55 h50
  text "IPC-6011/12 AND IPC-A-600E" at 9922.09,-1820.55 h50
  text "1" at 11322.09,-1820.55 h50
  text "2" at 11672.09,-1820.55 h50
  text "X" at 11567.09,-1825.55 h60
  text "X" at 9817.09,-1830.55 h60
  text "3" at 12022.09,-1905.55 h50
  text "UL CERTIFICATION" at 9922.09,-1940.55 h50
  text "AUSTEL" at 11322.09,-1940.55 h50
  text "X" at 9817.09,-1945.55 h60
  text "ML-P-55110F GRP" at 9902.09,-2060.55 h40
  text "A" at 10622.09,-2060.55 h50
  text "B" at 10972.09,-2060.55 h50
  text "AS2546" at 11322.09,-2060.55 h50
  text "OTHER" at 12022.09,-2060.55 h50
  text "ADDITIONAL" at 8907.09,-2175.55 h60
  text "NONE" at 9922.09,-2185.55 h50
  text "SAMPLE PLAN" at 10622.09,-2185.55 h50
  text "MIL-P-55110E SERIAL Nos. PER ORDER" at 11322.09,-2185.55 h50
  text "REQUIREMENTS:" at 8907.09,-2270.55 h60
  text "NONE" at 9922.09,-2305.55 h50
  text "ML-P-55110F GRP" at 10602.09,-2305.55 h40
  text "A" at 11322.09,-2305.55 h50
  text "B" at 11672.09,-2305.55 h50
  text "IPC CLASS:" at 11907.09,-2305.55 h50
  text "1" at 12517.09,-2305.55 h50
  text "2" at 12767.09,-2305.55 h50
  text "3" at 13017.09,-2305.55 h50
  text "QUALITY RELEASE REPORT" at 10622.09,-2425.55 h50
  text "OTHER" at 12217.09,-2425.55 h50
  text "PER ORDER" at 12552.09,-2430.55 h50
  text "X" at 12112.09,-2435.55 h60
  text "NONE" at 10622.09,-2545.55 h50
  text "REQUIRED" at 11322.09,-2545.55 h50
  text "PER ORDER" at 12222.09,-2545.55 h50
  text "ELECTRICAL TEST:" at 8907.09,-2550.55 h60
  text "X" at 11217.09,-2550.55 h60
  text "NONE" at 10622.09,-2665.55 h50
  text "1 SIDE" at 11317.09,-2665.55 h45
  text "2 SIDES" at 11757.09,-2665.55 h45
  text "MIN. PITCH" at 12217.09,-2665.55 h50
  text "0.65mm" at 12752.09,-2665.55 h50
  text "SURFACE MOUNT:" at 8907.09,-2670.55 h60
  text "X" at 11669.09,-2673.54 h60
  text "NONE" at 10622.09,-2785.55 h50
  text "FOIL" at 11322.09,-2785.55 h50
  text "LEGEND" at 11772.09,-2785.55 h50
  text "REFER" at 12217.09,-2785.55 h50
  text "MANUFACTURER'S ID/LOGO:" at 8907.09,-2790.55 h60
  text "ISO9001/AS3901" at 10772.09,-2905.55 h50
  text "NONE" at 12217.09,-2905.55 h50
  text "MANUFACTURER'S ACCREDITATION:" at 8907.09,-2910.55 h60
  text "X" at 10667.09,-2910.55 h60
  text "PER ORDER" at 10622.09,-3025.55 h50
  text "REFER" at 11322.09,-3025.55 h50
  text "PACKAGING AND HANDLING:" at 8907.09,-3030.55 h60
  text "X" at 10517.09,-3035.55 h60
WS Board Travel:
  lines w7.87: 3323.62,-255.91 3323.62,-330.71 3398.43,-255.91 3425.2,-255.91 ; 3401.57,-330.71 3476.38,-255.91 ; 3480.32,-330.71 3555.12,-255.91 ; 3559.06,-330.71 3633.86,-255.91 ; 3637.8,-330.71 3712.6,-255.91 ; 3716.54,-330.71 3805.31,-242.31
  lines w8: 3323.62,-330.71 3728.35,-330.71 3728.35,-425.2 3858.27,-295.28 3728.35,-165.35 3728.35,-255.91 3323.62,-255.91
  text "BOARD TRAVEL" at 3211.02,-519.29 h59.06
Mechanical 15:
  lines w7.87: 11.81,1602.36 7086.61,1602.36
Sheet Detail:
  drawing of 1882 lines, arcs and shapes, not listed
  text "1" at -1070.2,6420.91 h70
  text "2" at 860.46,6420.91 h70
  text "3" at 2799.81,6420.91 h70
  text "4" at 4740.46,6420.91 h70
  text "5" at 6680.46,6420.91 h70
  text "6" at 8610.46,6420.91 h70
  text "7" at 10560.46,6420.91 h70
  text "8" at 12490.46,6420.91 h70
  text "A" at -1941.54,5082.91 h70
  text "A" at 13358.46,5082.91 h70
  text "B" at -1941.54,2302.91 h70
  text "B" at 13358.46,2302.91 h70
  text "C" at -1941.54,-477.09 h70
  text "C" at 13358.46,-477.09 h70
  text "D" at -1941.54,-3237.09 h70
  text "D" at 13358.46,-3237.09 h70
  text "ENGINEER:" at 8833.46,-3244.09 h45
  text "TITLE:" at 10333.46,-3244.09 h45
  text "PCB DESIGNER:" at 8833.46,-3539.09 h45
  text "DATE:" at 8833.46,-3844.09 h45
  text "PART NO.:" at 10333.46,-3844.09 h45
  text "REV:" at 12433.46,-3844.09 h45
  text "Altium Limited" at 7533.46,-3944.09 h70
  text ".PRINT_DATE" at 8883.46,-3964.09 h70
  text "12a Rodborough Rd" at 7533.46,-4044.09 h70
  text "Frenchs Forest" at 7533.46,-4144.09 h70
  text "FILE NAME:" at 8833.46,-4144.09 h45
  text "DWG NO:" at 10333.46,-4144.09 h45
  text "SCALE:" at 12433.46,-4144.09 h45
  text "NSW 2086" at 7533.46,-4244.09 h70
  text ".PCB_FILE_NAME_NO_PATH" at 8883.46,-4264.09 h70
  text "1" at -1070.2,-4479.09 h70
  text "2" at 860.46,-4479.09 h70
  text "3" at 2799.81,-4479.09 h70
  text "4" at 4740.46,-4479.09 h70
  text "5" at 6680.46,-4479.09 h70
  text "6" at 8610.46,-4479.09 h70
  text "7" at 10560.46,-4479.09 h70
  text "8" at 12490.46,-4479.09 h70
Drill Drawing:
  drawing of 283 lines, arcs and shapes, not listed
  text "Symbol" at -1457.62,5035.63 h72
  text "Count" at -951.74,5035.63 h72
  text "Hole Size" at -351.9,5035.63 h72
  text "Plated" at 797.76,5035.63 h72
  text "Hole Type" at 1303.64,5035.63 h72
  text "Drill Layer Pair" at 2037.44,5035.63 h72
  text "Via/Pad" at 3536.99,5035.63 h72
  text "Pad Shape" at 4126.84,5035.63 h72
  text "Template" at 4872.64,5035.63 h72
  text "Hole Length" at 6142.26,5035.63 h72
  text "Routed Path Length" at 7291.93,5035.63 h72
  text "2" at -951.74,4885.63 h60
  text "11.81mil (0.300mm)" at -351.9,4885.63 h60
  text "PTH" at 797.76,4885.63 h60
  text "Round" at 1303.64,4885.63 h60
  text "Top Layer - Bottom Layer" at 2037.44,4885.63 h60
  text "Via" at 3536.99,4885.63 h60
  text "Rounded" at 4126.84,4885.63 h60
  text "v50h30m0mx0" at 4872.64,4885.63 h60
  text "-" at 6142.26,4885.63 h60
  text "-" at 7291.93,4885.63 h60
  text "1" at -951.74,4735.63 h60
  text "20.00mil (0.508mm)" at -351.9,4735.63 h60
  text "NPTH" at 797.76,4735.63 h60
  text "Round" at 1303.64,4735.63 h60
  text "Top Layer - Bottom Layer" at 2037.44,4735.63 h60
  text "Pad" at 3536.99,4735.63 h60
  text "Rounded" at 4126.84,4735.63 h60
  text "c38hn51" at 4872.64,4735.63 h60
  text "-" at 6142.26,4735.63 h60
  text "-" at 7291.93,4735.63 h60
  text "168" at -951.74,4585.63 h60
  text "23.62mil (0.600mm)" at -351.9,4585.63 h60
  text "PTH" at 797.76,4585.63 h60
  text "Round" at 1303.64,4585.63 h60
  text "Top Layer - Bottom Layer" at 2037.44,4585.63 h60
  text "(Mixed)" at 3536.99,4585.63 h60
  text "Rounded" at 4126.84,4585.63 h60
  text "(Mixed)" at 4872.64,4585.63 h60
  text "-" at 6142.26,4585.63 h60
  text "-" at 7291.93,4585.63 h60
  text "6" at -951.74,4435.63 h60
  text "29.53mil (0.750mm)" at -351.9,4435.63 h60
  text "PTH" at 797.76,4435.63 h60
  text "Round" at 1303.64,4435.63 h60
  text "Top Layer - Bottom Layer" at 2037.44,4435.63 h60
  text "Pad" at 3536.99,4435.63 h60
  text "(Mixed)" at 4126.84,4435.63 h60
  text "(Mixed)" at 4872.64,4435.63 h60
  text "-" at 6142.26,4435.63 h60
  text "-" at 7291.93,4435.63 h60
  text "58" at -951.74,4285.63 h60
  text "31.50mil (0.800mm)" at -351.9,4285.63 h60
  text "PTH" at 797.76,4285.63 h60
  text "Round" at 1303.64,4285.63 h60
  text "Top Layer - Bottom Layer" at 2037.44,4285.63 h60
  text "(Mixed)" at 3536.99,4285.63 h60
  text "Rounded" at 4126.84,4285.63 h60
  text "(Mixed)" at 4872.64,4285.63 h60
  text "-" at 6142.26,4285.63 h60
  text "-" at 7291.93,4285.63 h60
  text "95" at -951.74,4135.63 h60
  text "35.43mil (0.900mm)" at -351.9,4135.63 h60
  text "PTH" at 797.76,4135.63 h60
  text "Round" at 1303.64,4135.63 h60
  text "Top Layer - Bottom Layer" at 2037.44,4135.63 h60
  text "Pad" at 3536.99,4135.63 h60
  text "(Mixed)" at 4126.84,4135.63 h60
  text "(Mixed)" at 4872.64,4135.63 h60
  text "-" at 6142.26,4135.63 h60
  text "-" at 7291.93,4135.63 h60
  text "2" at -951.74,3985.63 h60
  text "39.37mil (1.000mm)" at -351.9,3985.63 h60
  text "PTH" at 797.76,3985.63 h60
  text "Slot" at 1303.64,3985.63 h60
  text "Top Layer - Bottom Layer" at 2037.44,3985.63 h60
  text "Pad" at 3536.99,3985.63 h60
  text "Rounded" at 4126.84,3985.63 h60
  text "(Mixed)" at 4872.64,3985.63 h60
  text "118.11mil (3.000mm)" at 6142.26,3985.63 h60
  text "78.74mil (2.000mm)" at 7291.93,3985.63 h60
  text "1" at -951.74,3835.63 h60
  text "39.37mil (1.000mm)" at -351.9,3835.63 h60
  text "PTH" at 797.76,3835.63 h60
  text "Slot" at 1303.64,3835.63 h60
  text "Top Layer - Bottom Layer" at 2037.44,3835.63 h60
  text "Pad" at 3536.99,3835.63 h60
  text "Rounded" at 4126.84,3835.63 h60
  text "r200_450h100_350r100" at 4872.64,3835.63 h60
  text "137.79mil (3.500mm)" at 6142.26,3835.63 h60
  text "98.43mil (2.500mm)" at 7291.93,3835.63 h60
  text "3" at -951.74,3685.63 h60
  text "43.31mil (1.100mm)" at -351.9,3685.63 h60
  text "PTH" at 797.76,3685.63 h60
  text "Round" at 1303.64,3685.63 h60
  text "Top Layer - Bottom Layer" at 2037.44,3685.63 h60
  text "Pad" at 3536.99,3685.63 h60
  text "Rounded" at 4126.84,3685.63 h60
  text "c200h110" at 4872.64,3685.63 h60
  text "-" at 6142.26,3685.63 h60
  text "-" at 7291.93,3685.63 h60
  text "4" at -951.74,3535.63 h60
  text "98.43mil (2.500mm)" at -351.9,3535.63 h60
  text "NPTH" at 797.76,3535.63 h60
  text "Round" at 1303.64,3535.63 h60
  text "Top Layer - Bottom Layer" at 2037.44,3535.63 h60
  text "Pad" at 3536.99,3535.63 h60
  text "Rounded" at 4126.84,3535.63 h60
  text "c230hn250" at 4872.64,3535.63 h60
  text "-" at 6142.26,3535.63 h60
  text "-" at 7291.93,3535.63 h60
  text "4" at -951.74,3385.63 h60
  text "129.92mil (3.300mm)" at -351.9,3385.63 h60
  text "NPTH" at 797.76,3385.63 h60
  text "Round" at 1303.64,3385.63 h60
  text "Top Layer - Bottom Layer" at 2037.44,3385.63 h60
  text "Pad" at 3536.99,3385.63 h60
  text "Rounded" at 4126.84,3385.63 h60
  text "(Mixed)" at 4872.64,3385.63 h60
  text "-" at 6142.26,3385.63 h60
  text "-" at 7291.93,3385.63 h60
  text "344 Total" at -951.74,3235.63 h60
  text "Slot definitions :" at -1457.62,3090.66 h60
  text "Routed Path Length" at -424.93,3090.66 h60
  text "= Calculated from tool start centre position to tool end centre position." at 677.74,3090.66 h60
  text "Hole Length" at -424.93,2990.69 h60
  text "= Routed Path Length + Tool Size = Slot length as defined in the PCB layout" at 267.87,2990.69 h60
  text "Layer" at 1376.71,-1480.77 h60
  text "Name" at 1786.63,-1480.77 h60
  text "Material" at 2716.37,-1480.77 h60
  text "Thickness" at 3576.14,-1480.77 h60
  text "Constant" at 4225.97,-1480.77 h60
  text "Board Layer Stack" at 4795.83,-1480.77 h60
  text "Top Overlay" at 1786.63,-1600.77 h60
  text "Top Solder" at 1786.63,-1720.77 h60
  text "Solder Resist" at 2716.37,-1720.77 h60
  text "0.40mil" at 3576.14,-1720.77 h60
  text "3.5" at 4225.97,-1720.77 h60
  text "1" at 1376.71,-1840.77 h60
  text "Top Layer" at 1786.63,-1840.77 h60
  text "1.40mil" at 3576.14,-1840.77 h60
  text "Dielectric1" at 1786.63,-1960.77 h60
  text "FR-4" at 2716.37,-1960.77 h60
  text "62.00mil" at 3576.14,-1960.77 h60
  text "4.8" at 4225.97,-1960.77 h60
  text "2" at 1376.71,-2080.77 h60
  text "Bottom Layer" at 1786.63,-2080.77 h60
  text "1.40mil" at 3576.14,-2080.77 h60
  text "Bottom Solder" at 1786.63,-2200.77 h60
  text "Solder Resist" at 2716.37,-2200.77 h60
  text "0.40mil" at 3576.14,-2200.77 h60
  text "3.5" at 4225.97,-2200.77 h60
  text "Bottom Overlay" at 1786.63,-2320.77 h60

## Dimensions
0,0 to -0.21,1988.19 on Dimensions
0,-0.21 to 7086.61,-0.21 on Dimensions

## Text inside footprints (layer, text, board x,y; h text height)
C1: Top Overlay "+" at 6766.49,840.91 h59.06 r180
C2: Top Overlay "+" at 6766.49,620.43 h59.06 r180
C3: Top Overlay "+" at 6766.49,399.96 h59.06 r180
HDR1: Top Overlay "10" at 3176.21,1718.73 h39.37; Top Overlay "9" at 3211.21,1818.73 h39.37; Top Overlay "1" at 3909.56,1819.05 h39.37; Top Overlay "2" at 3901.69,1712.75 h39.37
HDR2: Top Overlay "20" at 5110.11,1900.98 h39.37 r90; Top Overlay "19" at 5110.11,1600.98 h39.37 r90; Top Overlay "1" at 4210.11,1645.98 h39.37 r90; Top Overlay "2" at 4210.11,1900.98 h39.37 r90; Top Overlay "16" at 4910.11,1900.98 h39.37 r90; Top Overlay "12" at 4710.11,1900.98 h39.37 r90; Top Overlay "6" at 4410.11,1900.98 h39.37 r90; Top Overlay "15" at 4910.11,1600.98 h39.37 r90; Top Overlay "11" at 4710.11,1615.98 h39.37 r90; Top Overlay "5" at 4410.11,1635.98 h39.37 r90; Top Overlay "18" at 5010.11,1900.98 h39.37 r90; Top Overlay "17" at 5010.11,1600.98 h39.37 r90; Top Overlay "14" at 4810.11,1900.98 h39.37 r90; Top Overlay "13" at 4810.11,1600.98 h39.37 r90; Top Overlay "10" at 4610.11,1900.98 h39.37 r90; Top Overlay "9" at 4610.11,1635.98 h39.37 r90; Top Overlay "8" at 4510.11,1900.98 h39.37 r90; Top Overlay "7" at 4510.11,1635.98 h39.37 r90; Top Overlay "4" at 4310.11,1900.98 h39.37 r90; Top Overlay "3" at 4310.11,1635.98 h39.37 r90
HDR3: Top Overlay "3" at 5710.11,1635.98 h39.37 r90; Top Overlay "4" at 5710.11,1900.98 h39.37 r90; Top Overlay "7" at 5910.11,1635.98 h39.37 r90; Top Overlay "8" at 5910.11,1900.98 h39.37 r90; Top Overlay "9" at 6010.11,1635.98 h39.37 r90; Top Overlay "10" at 6010.11,1900.98 h39.37 r90; Top Overlay "13" at 6210.11,1600.98 h39.37 r90; Top Overlay "14" at 6210.11,1900.98 h39.37 r90; Top Overlay "17" at 6410.11,1600.98 h39.37 r90; Top Overlay "18" at 6410.11,1900.98 h39.37 r90; Top Overlay "5" at 5810.11,1635.98 h39.37 r90; Top Overlay "11" at 6110.11,1615.98 h39.37 r90; Top Overlay "15" at 6310.11,1600.98 h39.37 r90; Top Overlay "6" at 5810.11,1900.98 h39.37 r90; Top Overlay "12" at 6110.11,1900.98 h39.37 r90; Top Overlay "16" at 6310.11,1900.98 h39.37 r90; Top Overlay "2" at 5610.11,1900.98 h39.37 r90; Top Overlay "1" at 5610.11,1645.98 h39.37 r90; Top Overlay "19" at 6510.11,1600.98 h39.37 r90; Top Overlay "20" at 6510.11,1900.98 h39.37 r90
Logo5: Top Overlay "5V DC" at 6764.72,1512.36 h47.24